# Altium PCB Board_v2.PcbDoc
Units mm, origin at the board's own origin, x right, y up, seen from the top; angles counter-clockwise.
Board outline 48 x 44 mm, 4 copper layers (Top Layer, Layer 1, Layer 2, Bottom Layer), stack 0.904 mm thick; 57 components, 41 nets, 227 pads, 53 vias.
Unrouted connection lines stored in the file: 4.
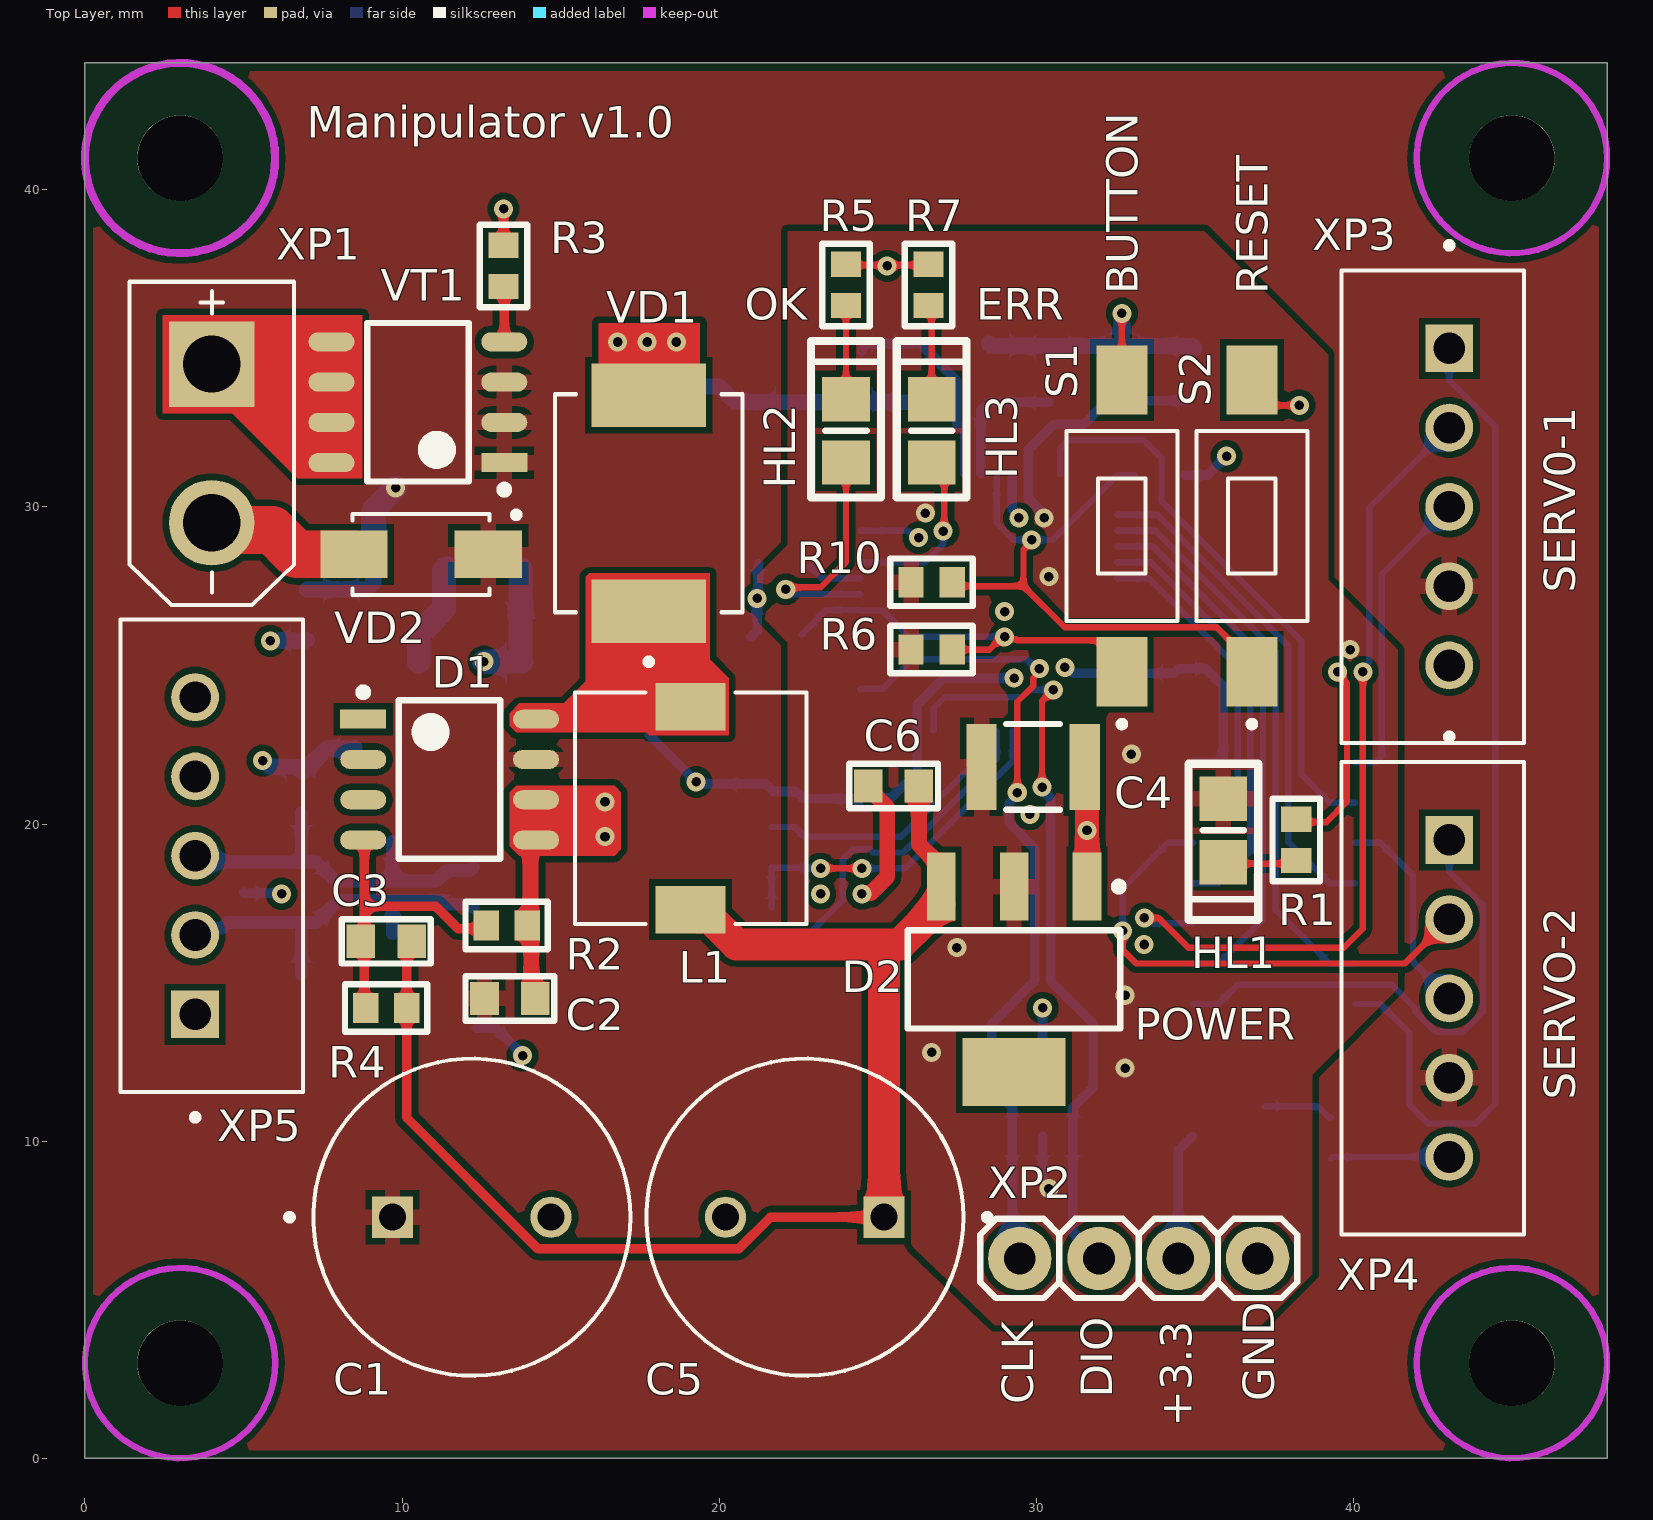
[diagram p0: Top Layer view]
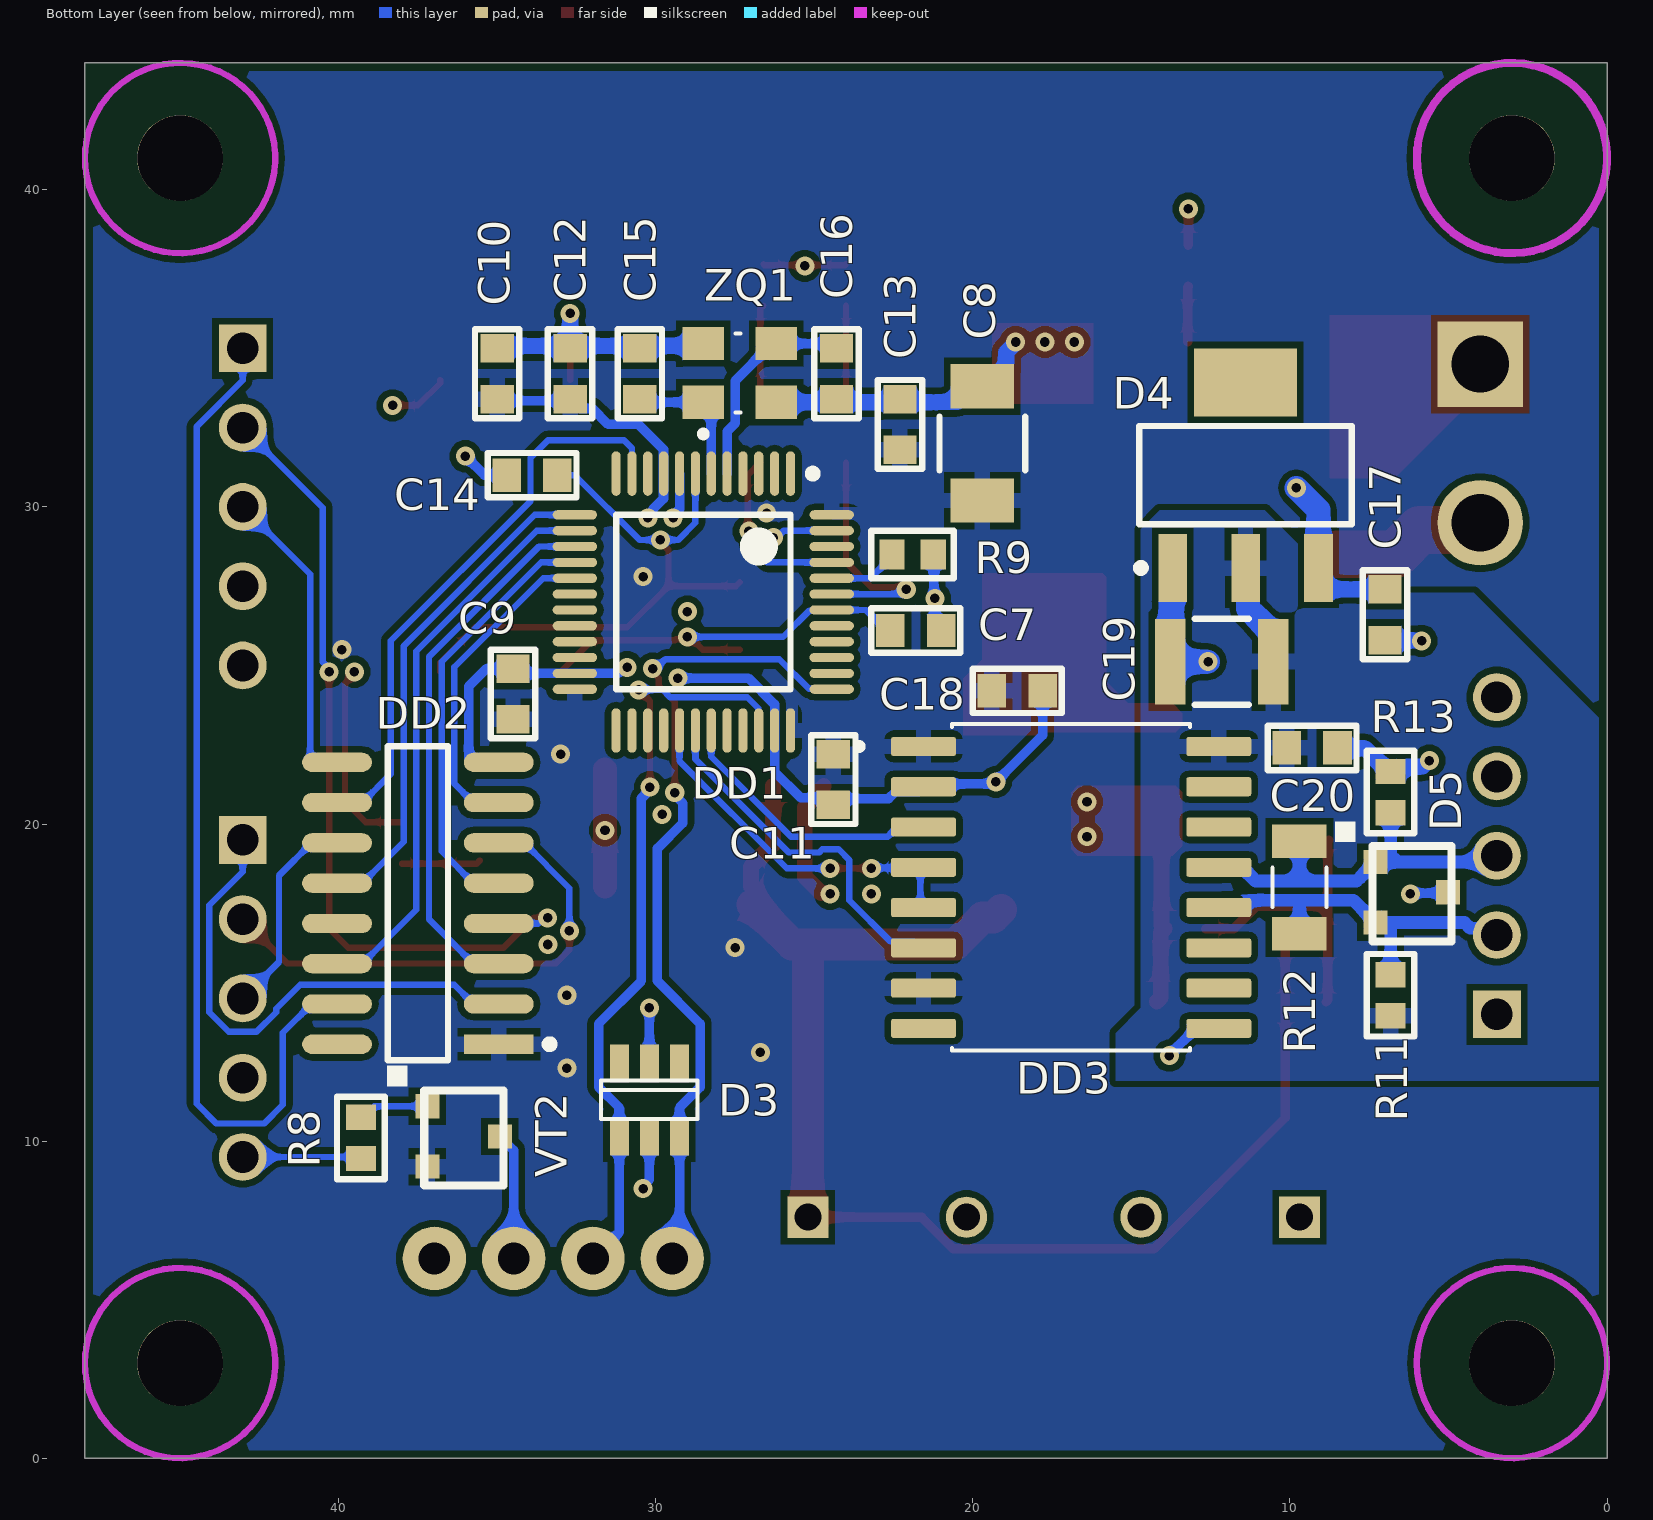
[diagram p1: Bottom Layer view, seen from below]
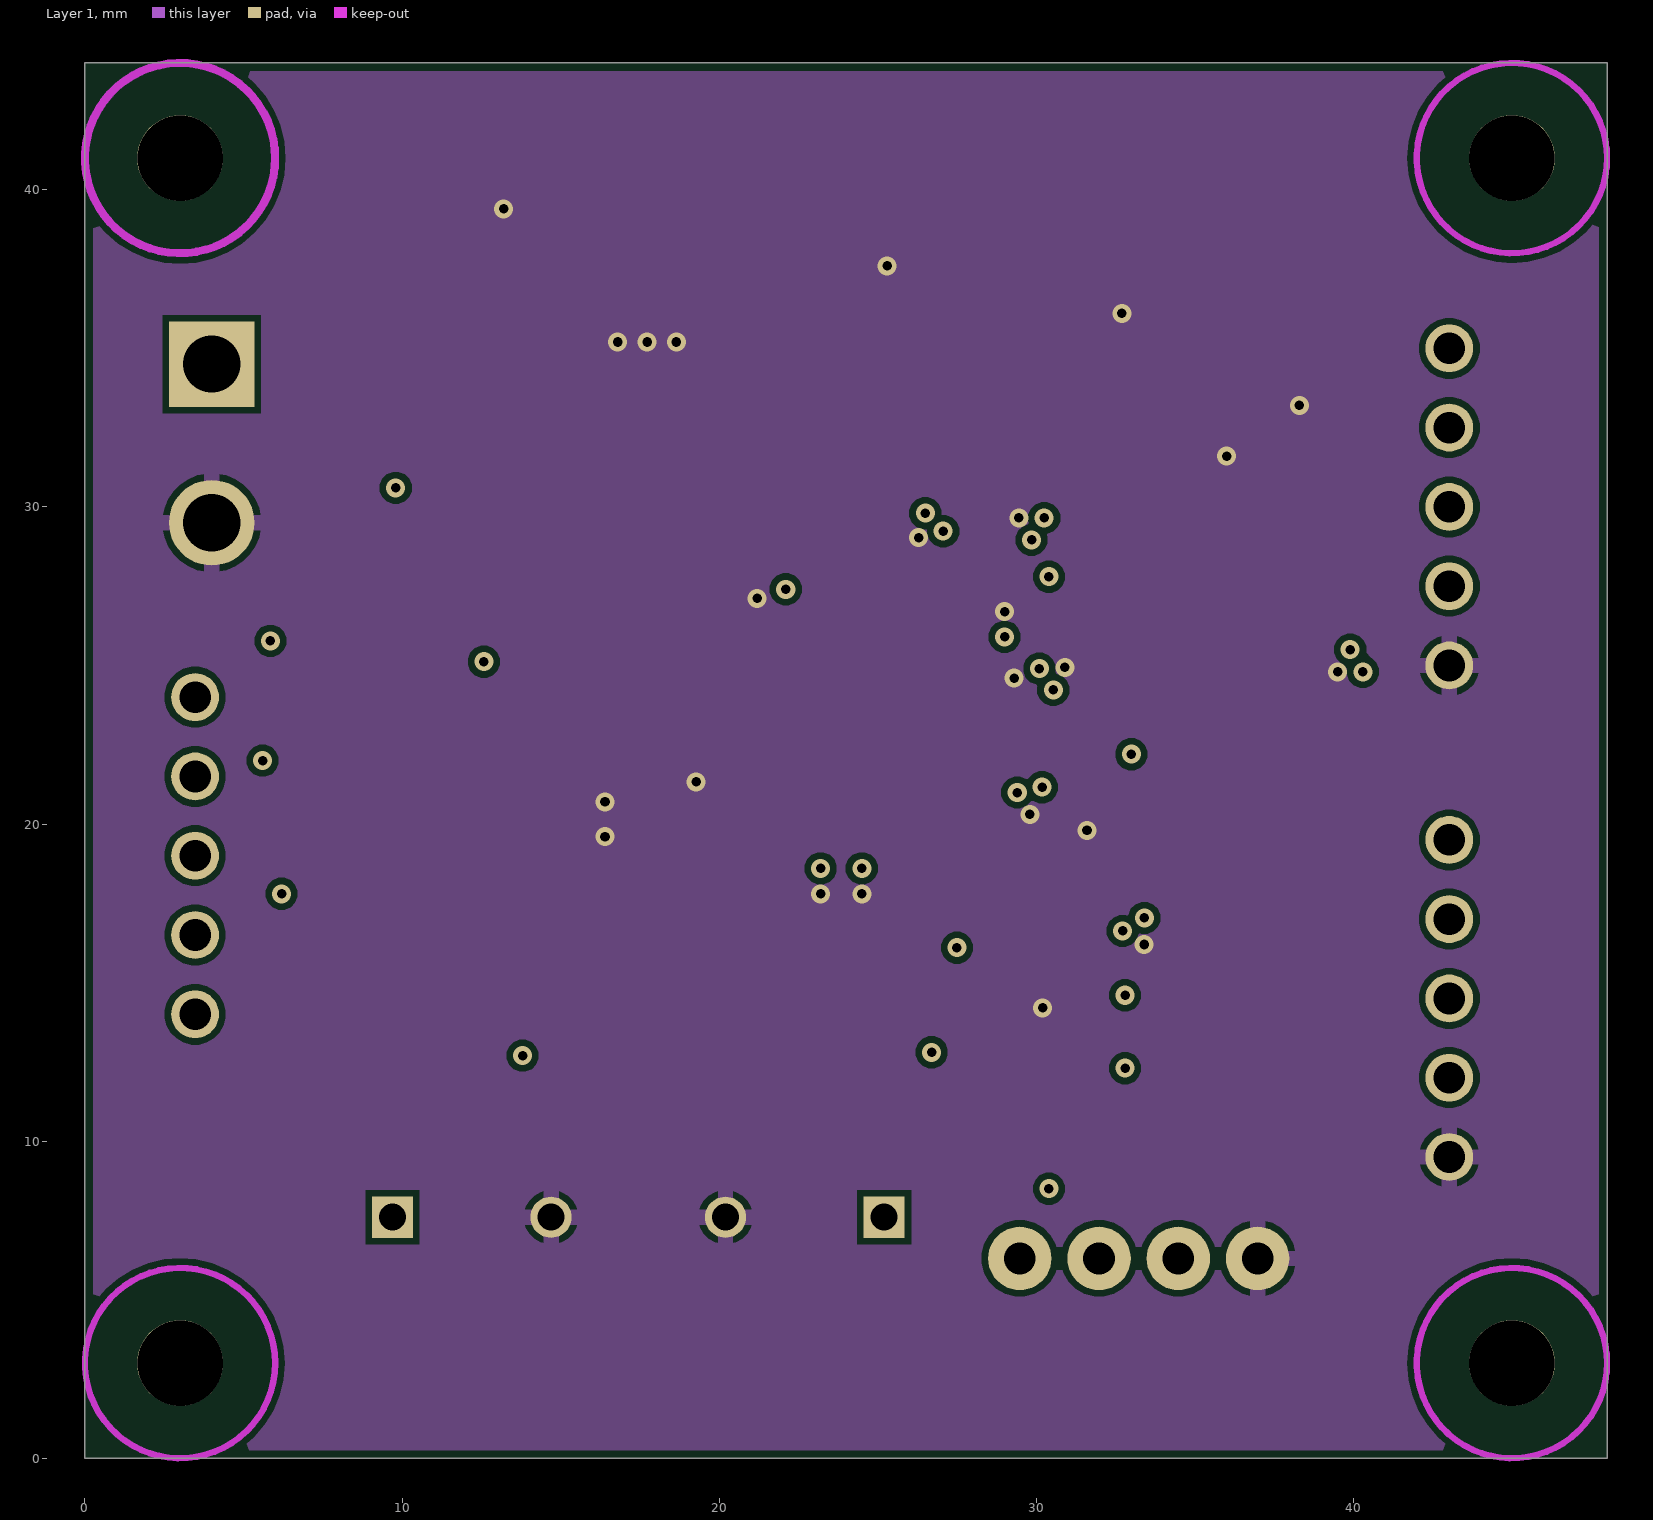
[diagram p2: Layer 1]
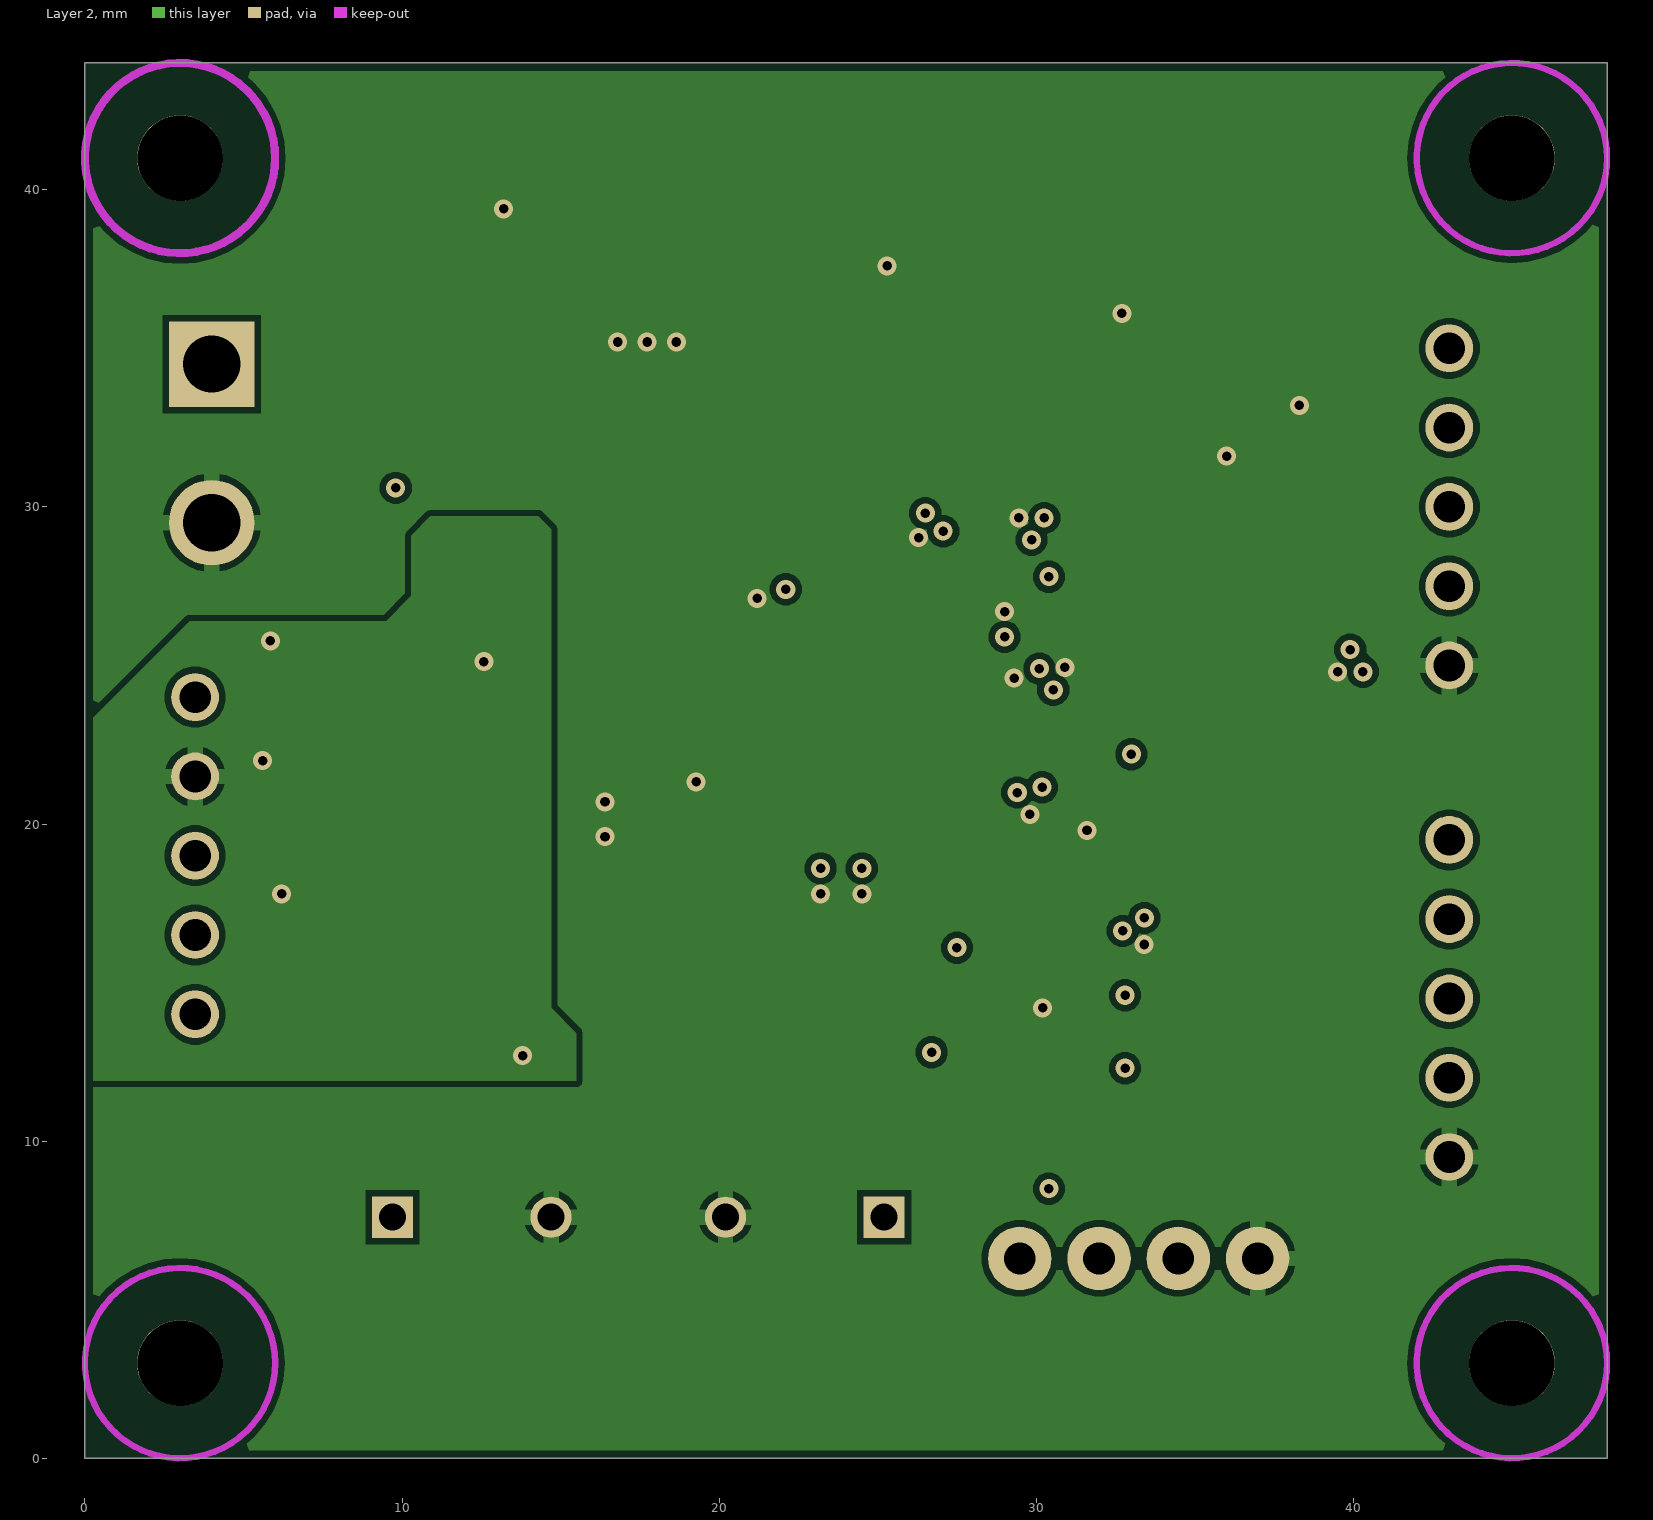
[diagram p3: Layer 2]

## Layer stack, top to bottom
Top Solder: solder mask 0.0254, SM-001, Dk 4
Top Layer: signal copper 0.035
Dielectric 2: prepreg 0.127, FR4, Dk 4.2
Layer 1: signal copper 0.035
Dielectric 1: core 0.51, FR4, Dk 4.6
Layer 2: signal copper 0.035
Dielectric 3: prepreg 0.127, FR4, Dk 4.2
Bottom Layer: signal copper 0.035
Bottom Solder: solder mask 0.0254, SM-001, Dk 4

## Board outline
0,0 48,0 48,44 0,44

## Design rules (kind name [scope] priority, off if disabled: settings)
AcuteAngle [All] p1: minimum=3.50000000000000E+0001 checktracksonly=FALSE
BoardOutlineClearance "BoardOutlineClearance 1" [All] p1: gap=0.25 ignorepadtopadclearanceinfootprint=FALSE except(0: Arc-SplitContinuation Track-SplitContinuation SMDPad-SplitContinuation THPad-SplitContinuation Via-SplitContinuation Fill-SplitContinuation Poly-SplitContinuation Region-SplitContinuation Text-SplitContinuation) // Milling
BoardOutlineClearance "BoardOutlineClearance 2" [All] p2: gap=0.4 ignorepadtopadclearanceinfootprint=FALSE except(0: Arc-SplitContinuation Track-SplitContinuation SMDPad-SplitContinuation THPad-SplitContinuation Via-SplitContinuation Fill-SplitContinuation Poly-SplitContinuation Region-SplitContinuation Text-SplitContinuation) // V-Cut
Clearance "Clearance 3 Oz" [All] p1 off: gap=0.35 ignorepadtopadclearanceinfootprint=FALSE except(0.25: Arc-Hole Track-Hole SMDPad-Hole THPad-Hole Via-Hole Fill-Hole Poly-Hole Region-Hole Text-Hole)
Clearance "Clearance 2 Oz" [All] p2 off: gap=0.3 ignorepadtopadclearanceinfootprint=FALSE except(0.25: Arc-Hole Track-Hole SMDPad-Hole THPad-Hole Via-Hole Fill-Hole Poly-Hole Region-Hole Text-Hole)
Clearance "Clearance-1 1 Oz" [All] p3: gap=0.2 ignorepadtopadclearanceinfootprint=FALSE except(0.25: Arc-Hole Track-Hole SMDPad-Hole THPad-Hole Via-Hole Fill-Hole Poly-Hole Region-Hole Text-Hole) // Standart
Clearance "Clearance-2 1 Oz" [All] p4 off: gap=0.15 ignorepadtopadclearanceinfootprint=FALSE except(0.2: Arc-Fill Arc-Poly Track-Fill Track-Poly SMDPad-Fill SMDPad-Poly THPad-Fill THPad-Poly Via-Fill Via-Poly Fill-Fill Fill-Poly Poly-Poly; 0.25: Arc-Hole Track-Hole SMDPad-Hole THPad-Hole Via-Hole Fill-Hole Poly-Hole Region-Hole Text-Hole) // Advance
Clearance "Clearance-1 1/2 Oz" [All] p5 off: gap=0.125 ignorepadtopadclearanceinfootprint=FALSE except(0.2: Arc-Fill Arc-Poly Track-Fill Track-Poly SMDPad-SMDPad SMDPad-Fill SMDPad-Poly THPad-Fill THPad-Poly Via-Fill Via-Poly Fill-Fill Fill-Poly Poly-Poly Poly-Region Poly-Text; 0.25: Arc-Hole Track-Hole SMDPad-Hole THPad-Hole Via-Hole Fill-Hole Poly-Hole Region-Hole Text-Hole) // Standart
Clearance "Clearance-2 1/2 Oz" [All] p6 off: gap=0.1 ignorepadtopadclearanceinfootprint=FALSE except(0.15: Arc-Fill Arc-Poly Track-Fill Track-Poly SMDPad-SMDPad SMDPad-Fill SMDPad-Poly THPad-Fill THPad-Poly Via-Fill Via-Poly Fill-Fill Fill-Poly Poly-Poly Poly-Region Poly-Text; 0.25: Arc-Hole Track-Hole SMDPad-Hole THPad-Hole Via-Hole Fill-Hole Poly-Hole Region-Hole Text-Hole) // Advance
DiffPairsRouting "DiffPairsRouting 1 Oz" [All] p1: maxlimit=0.25 minlimit=0.2 mostfreqgap=0.2 toplayer_minwidth=0.3 toplayer_maxwidth=0.4 toplayer_prefwidth=0.4 midlayer1_minwidth=0.3 midlayer1_maxwidth=0.4 midlayer1_prefwidth=0.4 midlayer2_minwidth=0.3 midlayer2_maxwidth=0.4 midlayer2_prefwidth=0.4 bottomlayer_minwidth=0.3 bottomlayer_maxwidth=0.4 bottomlayer_prefwidth=0.4 maxuncoupledlength=12.7
DiffPairsRouting "DiffPairsRouting 1/2 Oz" [All] p2 off: maxlimit=0.254 minlimit=0.1 mostfreqgap=0.254 toplayer_minwidth=0.1 toplayer_maxwidth=0.381 toplayer_prefwidth=0.381 midlayer1_minwidth=0.1 midlayer1_maxwidth=0.381 midlayer1_prefwidth=0.381 midlayer2_minwidth=0.1 midlayer2_maxwidth=0.381 midlayer2_prefwidth=0.381 bottomlayer_minwidth=0.1 bottomlayer_maxwidth=0.381 bottomlayer_prefwidth=0.381 maxuncoupledlength=12.7
HoleSize "Minimum HoleSize" [IsPad] p1: absolutevalues=TRUE maxlimit=5.9 minlimit=0.6 maxpercent=80.000 minpercent=20.000
HoleSize "Minimum HoleSize VIA 1" [IsVia] p2: absolutevalues=TRUE maxlimit=5.9 minlimit=0.3 maxpercent=80.000 minpercent=20.000 // Standart
HoleSize "Minimum HoleSize VIA 2" [IsVia] p3: absolutevalues=TRUE maxlimit=5.9 minlimit=0.2 maxpercent=80.000 minpercent=20.000 // Advance
HoleToHoleClearance Hole2HoleClearance [All] p1: gap=0.25 allowstackedmicrovias=FALSE
MinimumAnnularRing "Minimum AR VIA Standart" [IsVia] p1: minimumring=0.15
MinimumAnnularRing "Minimum AR PAD Standart" [IsPAD] p2: minimumring=0.2
MinimumAnnularRing "Minimum AR VIA Advance" [IsVia] p3: minimumring=0.1
MinimumAnnularRing "Minimum AR PAD Advance" [IsPAD] p4: minimumring=0.15
MinimumSolderMaskSliver "SolderMask Bridge Standart" [All] p1: minsoldermaskwidth=0.15 // All Masks
MinimumSolderMaskSliver "SolderMask Bridge Advance" [All] p2: minsoldermaskwidth=0.1 // Mask LDI
PlaneClearance "PlaneClearance 3 Oz" [All] p1 off: clearance=0.35
PlaneClearance "PlaneClearance 2 Oz" [All] p2 off: clearance=0.3
PlaneClearance "PlaneClearance 1 Oz" [All] p3: clearance=0.2
PlaneClearance "PlaneClearance-1 1/2 Oz" [All] p4 off: clearance=0.2 // Standart
PlaneClearance "PlaneClearance-2 1/2 Oz" [All] p5 off: clearance=0.15 // Advance
PlaneConnect "TermalConnect 3 Oz" [All] p1 off: planeconnectstyle=Relief reliefexpansion=0.2 reliefentries=4 reliefconductorwidth=0.35 reliefairgap=0.35 // Standart
PlaneConnect "TermalConnect 2 Oz" [All] p2 off: planeconnectstyle=Relief reliefexpansion=0.2 reliefentries=4 reliefconductorwidth=0.3 reliefairgap=0.3 // Standart
PlaneConnect "TermalConnect-1 1 Oz" [All] p3: planeconnectstyle=Relief reliefexpansion=0.2 reliefentries=4 reliefconductorwidth=0.5 reliefairgap=0.2 // Standart
PlaneConnect "TermalConnect-2 1 Oz" [All] p4 off: pad.planeconnectstyle=Relief pad.reliefexpansion=0.15 pad.reliefentries=4 pad.reliefconductorwidth=0.2 pad.reliefairgap=0.2 via.planeconnectstyle=Direct via.reliefexpansion=0.15 via.reliefentries=4 via.reliefconductorwidth=0.15 via.reliefairgap=0.15 // Advance
PlaneConnect "TermalConnect-1 1/2 Oz" [All] p5 off: planeconnectstyle=Relief reliefexpansion=0.2 reliefentries=4 reliefconductorwidth=0.2 reliefairgap=0.2 // Standart
PlaneConnect "TermalConnect-2 1/2 Oz" [All] p6 off: pad.planeconnectstyle=Relief pad.reliefexpansion=0.15 pad.reliefentries=4 pad.reliefconductorwidth=0.15 pad.reliefairgap=0.15 via.planeconnectstyle=Direct via.reliefexpansion=0.15 via.reliefentries=4 via.reliefconductorwidth=0.15 via.reliefairgap=0.15 // Advance
PolygonConnect "PolygonConnect 3 Oz" [All] p1 off: thpad.connectstyle=Relief thpad.reliefconductorwidth=0.35 thpad.reliefentries=4 thpad.polygonreliefangle="90 Angle" thpad.airgapwidth=0.35 smdpad.connectstyle=Relief smdpad.reliefconductorwidth=0.35 smdpad.reliefentries=4 smdpad.polygonreliefangle="90 Angle" smdpad.airgapwidth=0.35 via.connectstyle=Direct via.reliefconductorwidth=0.254 via.reliefentries=4 via.polygonreliefangle="90 Angle" via.airgapwidth=0.254
PolygonConnect "PolygonConnect 2 Oz" [All] p2 off: thpad.connectstyle=Relief thpad.reliefconductorwidth=0.3 thpad.reliefentries=4 thpad.polygonreliefangle="90 Angle" thpad.airgapwidth=0.3 smdpad.connectstyle=Relief smdpad.reliefconductorwidth=0.3 smdpad.reliefentries=4 smdpad.polygonreliefangle="90 Angle" smdpad.airgapwidth=0.3 via.connectstyle=Direct via.reliefconductorwidth=0.254 via.reliefentries=4 via.polygonreliefangle="90 Angle" via.airgapwidth=0.254
PolygonConnect "PolygonConnect-1 1 Oz" [All] p3: thpad.connectstyle=Relief thpad.reliefconductorwidth=0.5 thpad.reliefentries=4 thpad.polygonreliefangle="90 Angle" thpad.airgapwidth=0.2 smdpad.connectstyle=Relief smdpad.reliefconductorwidth=0.5 smdpad.reliefentries=4 smdpad.polygonreliefangle="90 Angle" smdpad.airgapwidth=0.2 via.connectstyle=Direct via.reliefconductorwidth=0.254 via.reliefentries=4 via.polygonreliefangle="90 Angle" via.airgapwidth=0.254 // Standart
PolygonConnect "PolygonConnect-2 1 Oz" [All] p4 off: thpad.connectstyle=Relief thpad.reliefconductorwidth=0.15 thpad.reliefentries=4 thpad.polygonreliefangle="90 Angle" thpad.airgapwidth=0.15 smdpad.connectstyle=Relief smdpad.reliefconductorwidth=0.15 smdpad.reliefentries=4 smdpad.polygonreliefangle="90 Angle" smdpad.airgapwidth=0.15 via.connectstyle=Direct via.reliefconductorwidth=0.254 via.reliefentries=4 via.polygonreliefangle="90 Angle" via.airgapwidth=0.254 // Advance
PolygonConnect "PolygonConnect-1 1/2 Oz" [All] p5 off: thpad.connectstyle=Relief thpad.reliefconductorwidth=0.15 thpad.reliefentries=4 thpad.polygonreliefangle="90 Angle" thpad.airgapwidth=0.2 smdpad.connectstyle=Relief smdpad.reliefconductorwidth=0.2 smdpad.reliefentries=4 smdpad.polygonreliefangle="90 Angle" smdpad.airgapwidth=0.2 via.connectstyle=Direct via.reliefconductorwidth=0.254 via.reliefentries=4 via.polygonreliefangle="90 Angle" via.airgapwidth=0.254 // Standart
PolygonConnect "PolygonConnect-2 1/2 Oz" [All] p6 off: thpad.connectstyle=Relief thpad.reliefconductorwidth=0.125 thpad.reliefentries=4 thpad.polygonreliefangle="90 Angle" thpad.airgapwidth=0.15 smdpad.connectstyle=Relief smdpad.reliefconductorwidth=0.125 smdpad.reliefentries=4 smdpad.polygonreliefangle="90 Angle" smdpad.airgapwidth=0.15 via.connectstyle=Direct via.reliefconductorwidth=0.254 via.reliefentries=4 via.polygonreliefangle="90 Angle" via.airgapwidth=0.254 // Advance
RoomDefinition MC_stm32 [InComponentClass('MC_stm32')] p1: confinementstyle=ConfineIn formatcopy=TRUE lockcomponents=FALSE outline 17.9,5.6 46,5.6 46,36.9 17.9,36.9
RoomDefinition "Power 3.3V to mc" [InComponentClass('Power 3.3V to mc')] p2: confinementstyle=ConfineIn formatcopy=TRUE lockcomponents=FALSE outline 7.625,8.8 38.4,8.8 38.4,37.5 7.625,37.5
RoomDefinition RS485 [InComponentClass('RS485')] p3: confinementstyle=ConfineIn formatcopy=TRUE lockcomponents=FALSE outline -2.75,10.75 17.025,10.75 17.025,29.7 -2.75,29.7
RoutingCorners [All] p1 off: cornerstyle=45-Degree minsetback=2.54 maxsetback=2.54
RoutingVias [All] p1: holewidth=0.3 width=0.6 viastyle="Through Hole" minholewidth=0.3 minwidth=0.6 maxholewidth=5.9 maxwidth=6.4
SilkToSilkClearance Silk2SilkClearance [All] p1 off: silktosilkclearance=0.15
SilkToSolderMaskClearance Silk2SolderMaskClearance [IsPad] p1 off: minsilkscreentomaskgap=0.15 clearancetoexposedcopper=TRUE
SolderMaskExpansion [HoleDiameter=0.3] p1: expansion=0.102 istentingtop=TRUE
SupplyNets "Schematic Supply Nets_4" [InNet('GND_SIGNAL')] p1: voltage=0.000
SupplyNets "Schematic Supply Nets_3" [InNet('GND')] p2: voltage=0.000
SupplyNets "Schematic Supply Nets_2" [InNet('+3,3 В')] p3: voltage=0.000
SupplyNets "Schematic Supply Nets_1" [InNet('+5 В')] p4: voltage=0.000
SupplyNets "Schematic Supply Nets" [InNet('+12 В')] p5: voltage=0.000
UnRoutedNet [All] p1: checkbadconnections=TRUE
Width "Width 3 Oz" [All] p1 off: maxlimit=10 minlimit=0.35 preferedwidth=0.4 checkconnectedcopper=TRUE
Width "Width 2 Oz" [All] p2 off: maxlimit=10 minlimit=0.3 preferedwidth=0.35 minimp=50.000000 maximp=50.000000 favimp=50.000000 checkconnectedcopper=TRUE
Width "Width 1 Oz" [All] p3: maxlimit=10 minlimit=0.2 preferedwidth=0.3 checkconnectedcopper=TRUE
Width "Width 1/2 Oz" [All] p4 off: maxlimit=10 minlimit=0.1 preferedwidth=0.125 checkconnectedcopper=TRUE
20 further rules are at their usual default settings.

## Classes and differential pairs
component class RS485: C17 C18 C19 C20 D4 D5 DD3 R11 R12 R13 XP5
component class "Power 3.3V to mc": C1 C2 C3 C4 C5 C6 D1 D2 HL1 L1 R1 R2 R3 R4 VD1 VD2 VT1 XP1
component class MC_stm32: C7 C8 C9 C10 C11 C12 C13 C14 C15 C16 D3 DD1 DD2 HL2 HL3 R5 R6 R7 R8 R9 R10 S1 S2 VT2 XP2 XP3 XP4 ZQ1
differential pair RS485: +RS485_P -RS485_N

## Components (designator, comment, footprint, x,y, rotation, side; value= is the part's Value field where it differs from the comment)
C1 "Capacitor_polar" RADIAL-2_10mm 12.2,7.6 r0 top value="470 мк"
C2 "Capacitor" 0603C 13.4,14.5 r0 top value="1 мк"
C3 "Capacitor" 0603C 9.5,16.3 r0 top value="3300 п"
C4 "Capacitor" 1210C 29.9,21.8 r0 top value="10 мк"
C5 "Capacitor_polar" RADIAL-2_10mm 22.7,7.6 r180 top value="470 мк"
C6 "Capacitor" 0603C 25.5,21.2 r180 top value="0,1 мк"
C7 "Capacitor" 0603C 21.8,26.1 r0 bottom value="0,1 мк"
C8 "Capacitor" 1206C 19.7,32 r90 bottom value="4,7 мк"
C9 "Capacitor" 0603C 34.5,24.1 r270 bottom value="1 мк"
C10 "Capacitor" 0603C 35,34.2 r270 bottom value="0,1 мк"
C11 "Capacitor" 0603C 24.4,21.4 r90 bottom value="0,01 мк"
C12 "Capacitor" 0603C 32.7,34.2 r270 bottom value="0,1 мк"
C13 "Capacitor" 0603C 22.3,32.6 r270 bottom value="0,1 мк"
C14 "Capacitor" 0603C 33.9,31 r180 bottom value="0,1 мк"
C15 "Capacitor" 0603C 30.5,34.2 r90 bottom value="12 п"
C16 "Capacitor" 0603C 24.3,34.2 r270 bottom value="12 п"
C17 "Capacitor" 0603C 7,26.6 r90 bottom value="0,1 мк"
C18 "Capacitor" 0603C 18.6,24.2 r0 bottom value="0,1 мк"
C19 "Capacitor" 1210C 12.15,25.118 r180 bottom value="10 мк"
C20 "Capacitor" 0603C 9.3,22.4 r0 bottom value="0,1 мк"
D1 "LM2594HVM-ADJ" SOIC-8 11.5,21.4 r0 top
D2 "LD1117S33CTR" SOT223 29.3,15.1 r270 top
D3 "USBLC6-4" SOT23-6 30.2,11.3 r0 bottom
D4 "LD1117S50CTR" SOT223 11.4,31 r90 bottom
D5 "PSM712" SOT23-3 7.3,18.8 r180 bottom
DD1 "STM32F103C8T6" LQFP48 28.5,27 r270 bottom
DD2 "CD4050B" SOIC-16 37.5,17.5 r0 bottom
DD3 "ADM2483BRWZ" SOIC-16W 16.9,18 r180 bottom
HL1 "LED" 0805D 36,19.9 r270 top
HL2 "LED" 0805D 23.9,32.3 r90 top
HL3 "LED" 0805D 26.6,32.3 r90 top
L1 "B82472G6683M" 7.3x7.3 19.1,20.5 r270 top value="68 мк"
R1 "Resistor" 0603R 38.2,19.5 r90 top value="1,0 к"
R2 "Resistor" 0603R 13.3,16.8 r180 top value="1,0 к"
R3 "Resistor" 0603R 13.2,37.6 r270 top value="10 к"
R4 "Resistor" 0603R 9.5,14.2 r0 top value="3,0 к"
R5 "Resistor" 0603R 24,37 r90 top value=200
R6 "Resistor" 0603R 26.7,25.5 r0 top value="10 к"
R7 "Resistor" 0603R 26.6,37 r90 top value="1,0 к"
R8 "Resistor" 0603R 39.3,10.1 r270 bottom value="10 к"
R9 "Resistor" 0603R 21.9,28.5 r180 bottom value="10 к"
R10 "Resistor" 0603R 26.7,27.624 r180 top value="10 к"
R11 "Resistor" 0603R 6.825,14.6 r90 bottom value=680
R12 "Resistor" 1206R 9.7,18 r90 bottom value=120
R13 "Resistor" 0603R 6.825,21.006 r90 bottom value=680
S1 "Tact_button" Button_SMD_10mm 32.7,29.4 r90 top
S2 "Tact_button" Button_SMD_10mm 36.8,29.4 r90 top
VD1 "SK32" SMC 17.8,30.1 r90 top
VD2 "SMAJ12CA" SMA 10.6,28.5 r180 top value="12 В"
VT1 "AO4411" SOIC-8 10.5,33.3 r180 top
VT2 "AO3401A" SOT23-3 37.2,11.1 r180 bottom
XP1 "XT30" XT30 4,32 r270 top
XP2 "PLS4" PLS4 29.4,6.3 r90 top
XP3 "CWF-5" CWF-5 42.5,30 r90 top
XP4 "CWF-5" CWF-5 42.5,14.5 r90 top
XP5 "CWF-5" CWF-5 4,19 r270 top
ZQ1 "XTAL_GND" QSMD3.2x2.5 28.5,33.3 r90 bottom value="8 МГц"

## Footprints (in the part's own frame and the unit in brackets; to place one, negate y for a bottom-side part, rotate by r counter-clockwise, add the part's x,y. Pads: shape width x height; smd on the part's side, far side on the other; paste and mask are expansions set on the pad)
7.3x7.3 [mm]
  rect 1.5x2.2 smd: 1(-3.2,0) 2(3.2,0)
  silkscreen extent -3.65,-3.65 3.65,3.65, body extent -3.65,-3.65 3.65,3.65, height 3.5
0603C [mm] "Chip Resistor, 2-Leads, Body 1,40x0,80mm, IPC Medium Density"
  rect 0.9x1.05 smd: 1(-0.8,0) 2(0.8,0)
  silkscreen extent -1.4,-0.7 1.4,0.7, body extent -0.85,-0.45 0.85,0.45, height 0.9
0603R [mm] "Chip Resistor, 2-Leads, Body 1.60x0.85mm, IPC Medium Density"
  rect 0.8x0.95 smd: 1(-0.65,0) 2(0.65,0)
  silkscreen extent -1.3,-0.75 1.3,0.75, body extent -0.87,-0.47 0.88,0.48, height 0.9
0805D [mm]
  rect 1.4x1.5 smd: 1(-0.9,-0.1) 2(1.1,-0.1)
  silkscreen extent -2,-1.2 2.93,1, body extent -0.97,-0.8 1.17,0.6, height 0.7
1206C [mm]
  rect 1.4x2 smd paste+0 mask+0: 1(-1.8,0) 2(1.8,0)
  silkscreen extent -0.85,-1.35 0.85,1.35, body extent -1.6,-0.74 1.6,0.86, height 1.59
1206R [mm]
  rect 1.05x1.72 smd: 1(-1.46,0) 2(1.46,0)
  silkscreen extent -0.62,-0.85 0.62,0.85, body extent -1.55,-0.77 1.55,0.78, height 0.65
1210C [mm]
  rect 0.954x2.706 smd paste+0 mask+0: 1(-1.625,0) 2(1.625,0)
  silkscreen extent -0.85,-1.35 0.85,1.35, body extent -2.35,-1.6 2.35,1.6, height 0.25
Button_SMD_10mm [mm]
  rect 2.18x1.6 smd: 1(-4.6,0) 2(4.6,0)
  silkscreen extent -6.35,-1.75 3,1.75, body extent -3.4,-1.75 3.4,1.75, height 5.2
CWF-5 [mm] "B5B-XH-A"
  rect 1.508x1.508 / inner round 1.508 / far side rect 1.508x1.508 hole 1: 1(5,-0.525)
  round 1.508 hole 1: 2(2.5,-0.525) 3(0,-0.525) 4(-2.5,-0.525) 5(-5,-0.525)
  silkscreen extent -7.45,-2.88 8.35,2.88, body extent -7.45,-2.88 7.45,2.88, height 7
LQFP48 [mm] "TSQFP, 48-Leads, Body 7,00x7,00mm, Pitch 0,50mm, IPC Medium Density"
  oval 1.4x0.29 smd: 1(-4.05,2.75) 2(-4.05,2.25) 3(-4.05,1.75) 4(-4.05,1.25) 5(-4.05,0.75) 6(-4.05,0.25) 7(-4.05,-0.25) 8(-4.05,-0.75) 9(-4.05,-1.25) 10(-4.05,-1.75) 11(-4.05,-2.25) 12(-4.05,-2.75)
  oval 0.29x1.4 smd paste+0 mask+0.09: 13(-2.75,-4.05) 14(-2.25,-4.05) 15(-1.75,-4.05) 16(-1.25,-4.05) 17(-0.75,-4.05) 18(-0.25,-4.05) 19(0.25,-4.05) 20(0.75,-4.05) 21(1.25,-4.05) 22(1.75,-4.05) 23(2.25,-4.05) 24(2.75,-4.05) 37(2.75,4.05) 38(2.25,4.05) 39(1.75,4.05) 40(1.25,4.05) 41(0.75,4.05) 42(0.25,4.05) 43(-0.25,4.05) 44(-0.75,4.05) 45(-1.25,4.05) 46(-1.75,4.05) 47(-2.25,4.05) 48(-2.75,4.05)
  oval 1.4x0.29 smd paste+0 mask+0.09: 25(4.05,-2.75) 26(4.05,-2.25) 27(4.05,-1.75) 28(4.05,-1.25) 29(4.05,-0.75) 30(4.05,-0.25) 31(4.05,0.25) 32(4.05,0.75) 33(4.05,1.25) 34(4.05,1.75) 35(4.05,2.25) 36(4.05,2.75)
  silkscreen extent -4.17,-2.75 2.75,3.57, body extent -4.5,-4.47 4.5,4.52, height 1.48
PLS4 [mm]
  round 2 hole 1: 1(0,-0.08) 2(0,-2.58) 3(0,-5.08) 4(0,-7.58)
  silkscreen extent -1.25,-8.83 1.25,1.17, body extent -1.27,-8.93 1.27,1.19, height 8.44
QSMD3.2x2.5 [mm] "Кварцевый резонатор"
  rect 1.05x1.3 smd: 1(0,0) 2(1.85,-2.3) 3(0,-2.3) 3(1.85,0)
  silkscreen extent -1.1,-1.18 2.18,0.1, body extent -0.33,-2.75 2.17,0.45, height 0.8
RADIAL-2_10mm [mm]
  rect 1.3x1.3 hole 0.85: 1(-2.5,0)
  round 1.3 hole 0.85: 2(2.5,0)
  silkscreen extent -5.85,-5 5,5, body extent -5,-5 5,5, height 12.5
SMA [mm]
  rect 2.12x1.5 smd: 1(2.115,0) 2(-2.115,0)
  silkscreen extent -3.1,-1.35 2.16,1.28, body extent -2.57,-1.28 2.57,1.28, height 2.5
SMC [mm]
  rect 2x3.6 smd: 1(3.415,0.021) 2(-3.385,0.021)
  silkscreen extent -5.08,-2.93 3.45,2.97, body extent -3.96,-2.93 3.99,2.97, height 2.65
SOIC-8 [mm] "for operational amplifier"
  rect 1.45x0.6 smd: 1(-2.725,1.905)
  oval 1.45x0.6 smd: 2(-2.725,0.635) 3(-2.725,-0.635) 4(-2.725,-1.905) 5(2.725,-1.905) 6(2.725,-0.635) 7(2.725,0.635) 8(2.725,1.905)
  silkscreen extent -2.85,-2.5 1.6,2.88, body extent -3,-2.5 3,2.5, height 1.75
SOIC-16 [mm] "SOT109-1"
  rect 2.204x0.608 smd paste+0 mask+0: 1(-2.551,4.445)
  rrect100% 2.204x0.608 smd paste+0 mask+0: 2(-2.551,3.175) 3(-2.551,1.905) 4(-2.551,0.635) 5(-2.551,-0.635) 6(-2.551,-1.905) 7(-2.551,-3.175) 8(-2.551,-4.445) 9(2.551,-4.445) 10(2.551,-3.175) 11(2.551,-1.905) 12(2.551,-0.635) 13(2.551,0.635) 14(2.551,1.905) 15(2.551,3.175) 16(2.551,4.445)
  silkscreen extent -4.28,-4.95 0.95,4.95, body extent -3.02,-4.95 3.02,4.95, height 1.75
SOIC-16W [mm]
  rrect25% 2.05x0.6 smd: 1(-4.655,4.445) 2(-4.655,3.175) 3(-4.655,1.905) 4(-4.655,0.635) 5(-4.655,-0.635) 6(-4.655,-1.905) 7(-4.655,-3.175) 8(-4.655,-4.445) 9(4.655,-4.445) 10(4.655,-3.175) 11(4.655,-1.905) 12(4.655,-0.635) 13(4.655,0.635) 14(4.655,1.905) 15(4.655,3.175) 16(4.655,4.445)
  silkscreen extent -6.78,-5.15 3.75,5.15, body extent -5.16,-5.15 5.16,5.15, height 2.65
SOT23-3 [mil]
  rect 30x30 smd: 1(0,0) 2(0,-75) 3(90,-37.5)
  silkscreen extent -50,-98 94,50, body extent -4,-97 94,21, height 41
SOT23-6 [mm]
  rect 0.6x1.2 smd: 1(-0.95,-1.15) 2(0,-1.15) 3(0.95,-1.15) 4(0.95,1.15) 5(0,1.15) 6(-0.95,1.15)
  silkscreen extent -1.52,-0.61 1.52,0.61, body extent -1.46,-1.4 1.46,1.4, height 1.4
SOT223 [mm] "SOT223, ld1117"
  rect 2.15x0.9 smd: 1(-2.925,2.3) 2(-2.925,0) 3(-2.925,-2.3)
  rect 2.15x3.25 smd: 4(2.925,0)
  silkscreen extent -3.05,-3.35 1.55,3.43, body extent -3.56,-3.3 3.51,3.2, height 1.6
XT30 [mm]
  rect 2.7x2.7 hole 1.8: 1(-2.5,0)
  round 2.7 hole 1.8: 2(2.5,0)
  silkscreen extent -5.1,-2.6 5.1,2.6, body extent -5.1,-2.6 5.1,2.6, height 10.7

## Part data
C1 C5: library part "4,7 мк", "Конденсатор электролит. 470 мкФ, 25 В, 10 мм", Part Number=Capacitor_polar
C2 C9: library part Capacitor_1u_10_50V_X7R_0603C, "Конденсатор", Capacity (nF)=1000, Dielectric=X7R, Tolerance=0,1, Voltage (V)=50, Part Number=Capacitor_1u_10_50V_X7R_0603C
C3: library part Capacitor_3,3n_10_50V_X7R_0603C, "Конденсатор", Capacity (nF)=3,3, Dielectric=X7R, Tolerance=0,1, Voltage (V)=50, Part Number=Capacitor_3,3n_10_50V_X7R_0603C
C4 C19: library part Capacitor_10u_10_35V_X7R_1210C, "Конденсатор", Capacity (nF)=10000, Dielectric=X7R, Tolerance=0,1, Voltage (V)=35, Part Number=Capacitor_10u_10_35V_X7R_1210C
C6 C7 C10 C12 C13 C14 C17 C18 C20: library part Capacitor_0,1u_10_50V_X7R_0603C, "Конденсатор", Capacity (nF)=100, Dielectric=X7R, Tolerance=0,1, Voltage (V)=50, Part Number=Capacitor_0,1u_10_50V_X7R_0603C
C8: library part Capacitor_4,7u_10_50V_X7R_1206C, "Конденсатор", Capacity (nF)=4700, Dielectric=X7R, Tolerance=0,1, Voltage (V)=50, Part Number=Capacitor_4,7u_10_50V_X7R_1206C
C11: library part Capacitor_10n_10_50V_X7R_0603C, "Конденсатор", Capacity (nF)=10, Dielectric=X7R, Tolerance=0,1, Voltage (V)=50, Part Number=Capacitor_10n_10_50V_X7R_0603C
C15 C16: library part "0,1 мк", "Конденсатор", Part Number=Capacitor
D1: "DC-DC преобразователь", Part Number=LM2594HVM-ADJ
D2 D4: "Линейный стабилизатор напряжения"
  D2: Part Number=LD1117S33CTR
  D4: Part Number=LD1117S50CTR
D3: "Сборка защитных диодов для USB", ComponentLink1Description=Shop, ComponentLink1URL=https://www.chipdip.ru/product0/8001780508, Part Number=USBLC6-4
D5: "Защитный диод для линии RS-485", Interface=RS-485, Part Number=PSM712
DD1: "Микроконтроллер", Case=корпус, Manufacturer="ST Microelectronics", Value1=MCU, Datasheet=http://www.st.com/content/ccc/resource/technical/document/datasheet/33/d4/6f/1d/df/0b/4c/6d/CD00161566.pdf/files/CD00161566.pdf/jcr:content/translations/en.CD00161566.pdf, Notice="48 пиновая версия STM32F103", Part Number=STM32F103C8T6, Rate=-0,3...4,0В, Shop="магазин с самой дешевой ценой"
DD2: "Шесть буферных элементов", Part Number=CD4050B
DD3: "Прием передатчик RS485 с гальванической развязкой", Part Number=ADM2483BRWZ
HL1 HL3: "Светодиод", Color=Красный, Part Number=LED
HL2: "Светодиод", Color=Зеленый, Part Number=LED
L1: "B82472G6683M, ЧИП-индуктивность экранированная 68мкГн ±20%, 0.82A, 26мОм", Part Number=B82472G6683M
R1 R2 R7: library part Resistor_1.0k_1_0603, "Резистор номиналом 1,0 кОм и точностью 1%", Tolerance=1%, Part Number=Resistor_1.0k_1_0603
R3 R6 R8 R9 R10: library part Resistor_10k_1_0603, "Резистор номиналом 10 кОм и точностью 1%", Tolerance=1%, Part Number=Resistor_10k_1_0603
R4: library part Resistor_3.0k_1_0603, "Резистор номиналом 3,0 кОм и точностью 1%", Tolerance=1%, Part Number=Resistor_3.0k_1_0603
R5: library part Resistor_200_1_0603, "Резистор номиналом 200 Ом и точностью 1%", Tolerance=1%, Part Number=Resistor_200_1_0603
R11 R13: library part Resistor_680_1_0603, "Резистор номиналом 680 Ом и точностью 1%", Tolerance=1%, Part Number=Resistor_680_1_0603
R12: library part Resistor_120_1_0603, "Резистор номиналом 120 Ом и точностью 1%", Tolerance=1%, Part Number=Resistor_120_1_0603
S1 S2: "Тактовая кнопка", Part Number=Tact_button
VD1: "Диод шоттки на 20 В, номинальный ток 3 А", Current (A)=3, Voltage nominal (V)=20, Part Number=SK32
VD2: "Защитный диод на 12 В, рассеиваемая мощность 400 Вт", Power (W)=400, Voltage nominal (V)=12, Part Number=SMAJ12CA
VT1 VT2: "P-канальный MOSFET"
  VT1: Part Number=AO4411
  VT2: Part Number=AO3401A
XP1: "2-пиновый разъем с ключом", Value1=+U_in, Value2=GND, Part Number=XT30
XP2: "Гребенка 4 пина", Value1=SWCLK, Value2=SWDIO, Value3="+3,3 В", Value4=GND, Part Number=PLS4
XP3: "5-пиновый разъем с ключом", Value2=SERVO1_PWM, Value3=SERVO1_FB, Value4="+12 В", Value5=GND, Part Number=CWF-5, SERVO1_DIR=SERVO1_DIR
XP4: "5-пиновый разъем с ключом", Value1=SERVO2_DIR, Value2=SERVO2_PWM, Value3=SERVO2_FB, Value4="+12 В", Value5=GND, Part Number=CWF-5
XP5: "5-пиновый разъем с ключом", Value1=NC, Value2=RS485_A, Value3=RS485_B, Value4=GND_SIGNAL, Part Number=CWF-5, Value5=NC
ZQ1: "WTL3M85421FO, Резонатор кварцевый 8МГц, 10PPM при 25°C, 20PPM при -40°С+85°C, 400Ом, 12пФ", Part Number=XTAL_GND

## Free pads (board coordinates)
  round 2.7 hole 2.7 unplated: 9(3,3) 9(3,41) 9(45,3) 9(45,41)

## Via types
v1: diameter 0.6, hole 0.3, Top Layer to Bottom Layer, tented both sides, 53 vias

## Nets (pads, with @x,y where several pads share a name; then routed paths per layer and width w, separated by ;. In a path a pad name is that pad's centre, name@x,y a point inside that pad or via, vN(x,y) a via of type N, cw(c..) or ccw(c..) an arc to the next point about the centre after c; other vN are vias at no path point)
"+3,3 В": C4.1 C8.1 C9.2 C10.2 C11.2 C12.2 C13.2 C18.2 D2.2 D3.5 DD1.9 DD1.24 DD1.36 DD1.48 DD2.1 DD3.1 DD3.7 HL1.1 R6.1 R10.2 VT2.2 | length 9.7
  Bottom Layer w0.3: D3.5 30.2,8.781 30.4,8.581 v1(30.4,8.5) ; v1(30.25,29.65) 30.25,29.731 30.1,29.881 30.1,29.919 29.755,30.264 29.755,31.045 DD1.9 29.755,31.055 29.755,31.81 30.545,32.6 31.5,32.6 32,33.1 32.4,33.1 C12.2 ; C12.2@32.7,33.35 C10.2@34.675,33.35
  other v1: 32.8,12.3 26.7,12.8 32.8,14.6 27.5,16.1 33,22.2 39.9,25.5 30.4,27.8 26.5,29.8
"+5 В": C19.2 C20.2 D4.2 DD3.16 R11.1 | length 3.3
  Bottom Layer w0.75: C19.2 10.525,25.994 11.325,26.794 11.325,28 D4.2
"+12 В": C1.1 C2.1 C17.2 D1.7 D4.3 VD2.2 VT1.1 VT1.2 VT1.3 XP3.4 XP4.4 | length 5.5
  Bottom Layer w0.5: C17.2 8.9,27.4 9.1,27.6 D4.3
  Bottom Layer w0.75: D4.3 9.1,29.9 v1(9.8,30.6)
BUTTON: C7.2 DD1.42 R6.2 S1.1 | length 13.3
  Top Layer w0.2: R6.2 28.513,25.5 v1@28.913,25.9 ; v1(29,25.9) 29.077,25.823 29.359,25.823 29.393,25.79 32.01,25.79 S1.1@33,24.8
  Bottom Layer w0.2: C7.2@22.6,25.975 23.375,26.75 DD1.42 24.467,26.733 25.152,26.733 25.984,25.9 v1(29,25.9)
GND: C1.2 C2.2 C4.2 C5.2 C6.2 C7.1 C8.2 C9.1 C10.1 C11.1 C12.1 C13.1 C14.1 C15.2 C16.2 C18.1 D1.5 D1.6 D2.1 D3.2 DD1.8 DD1.23 DD1.35 DD1.47 DD2.8 DD3.2 R1.2 R2.1 R3.1 R5.2 R7.2 R8.2 R9.2 S1.2 S2.2 VD1.1 VD2.1 XP1.2 XP2.4 XP3.5 XP4.5 ZQ1.3 | length 88.2
  Top Layer w0.2: R5.2 24.025,37.625 25.275,37.625 v1(25.3,37.6) 25.325,37.625 26.575,37.625 R7.2 ; S1.2 v1(32.7,36.1) ; S2.2 36.8,33.9 37.5,33.2 v1(38.3,33.2) ; R1.2@38,20.05 38.008,20.058 39.141,20.058 39.8,20.717 39.8,24.426 39.5,24.726 v1(39.5,24.8)
  Top Layer w0.3: R3.1 v1(13.2,39.4)
  Top Layer w0.5: D1.5@13.95,19.495 14.179,19.495 D1.5@14.225,19.541 ; C2.2@14.2,14.4 14.075,14.525 14.075,16.575 13.95,16.7 14.05,16.8 14.05,19.283 14.225,19.458 D1.5 ; v1@24.519,17.819 24.78,17.819 25.3,18.339 25.3,20.525 24.9,20.925 24.9,21 C6.2 ; 31.525,20.446 C4.2
  Top Layer w0.75: D2.1 v1(31.6,19.8) 31.6,20.3 31.6,20.75 C4.2@31.6,21.725
  Top Layer w1.5: XP1.2 4.23,29.27 5.905,29.27 6.675,28.5 VD2.1
  Bottom Layer w0.2: DD1.47 25.96,29.25 26.182,29.028 v1(26.29,29.028) ; R8.2 39.35,9.5 XP4.5
  Bottom Layer w0.3: C18.1 17.8,22.8 19.332,21.268 21.462,21.268 21.705,21.025 22.43,21.025 22.655,20.8 24.4,20.8 C11.1 ; C7.1@21,25.9 21.2,26.1 v1(21.2,27.113) 21.225,27.137 21.225,28.175 R9.2@21.25,28.2 ; C11.1@24.505,20.83 25.43,20.83 26.245,21.645 26.245,22.945 DD1.35 26.25,23.771 27.079,24.6 v1(29.3,24.6) ; DD1.8 29.25,29.931 29.45,29.731 v1(29.45,29.65) ; D3.2 v1(30.2,14.2) ; v1(30.904,24.942) 30.985,24.942 31.177,24.75 DD1.23 34.35,24.75 C9.1 35.34,24.9 35.901,24.338 35.901,22.182 35.664,21.945 DD2.8 ; C14.1 35.4,31 v1(36,31.6)
  Bottom Layer w0.5: v1(18.65,35.2) 18.65,35.173 18.95,34.873 18.95,34.25 19.4,33.8 C8.2 20,33.8 20.5,33.3 22.4,33.3 24.3,33.3 ZQ1.3@26.2,33.3 ; ZQ1.3@28.5,35.15 28.575,35.075 C12.1@32.7,35.075 ; C12.1 C12.1@32.7,35.075 ; v1(32.7,36.1) C12.1@32.7,35.075 ; C10.1 34.925,35.075 C12.1@32.7,35.075
  other v1: 33.4,16.2 23.2,17.8 24.5,17.8 16.4,19.6 29.8,20.3 16.4,20.7 19.275,21.325 29,26.7 16.8,35.2 17.725,35.2
GND_SIGNAL: C17.1 C19.1 C20.1 D4.1 D5.3 DD3.9 R13.2 XP5.4 | length 11.8
  Bottom Layer w0.3: XP5.4 XP5.4@3.525,21.45 ; D5.3 5.038,17.824 6.176,17.824 v1(6.2,17.8) ; DD3.9@12.345,13.555 12.97,13.555 13.799,12.726 v1(13.799,12.695)
  Bottom Layer w0.5: v1(5.6,22) 5.627,22 5.821,21.806 6.675,21.806 R13.2 6.9,21.656 7.627,22.384 8.484,22.384 C20.1 ; v1(5.85,25.775) 5.863,25.787 6.988,25.787 C17.1 ; D4.1 D4.1@13.738,28.037 ; C19.1@13.738,25.155 C19.1
  Bottom Layer w0.75: v1(12.582,25.118) C19.1 ; C19.1@13.738,25.155 D4.1@13.738,28.037
LED_ERROR: DD1.45 HL3.1 | length 5.6
  Top Layer w0.2: HL3.1 27.1,31 27.1,29.269 v1(27.064,29.232)
  Bottom Layer w0.2: DD1.45 26.491,28.25 27.064,28.823 v1(27.064,29.232)
LED_OK: DD1.43 HL2.1 | length 7.8
  Top Layer w0.2: v1(22.1,27.4) 22.161,27.461 23.2,27.461 24,28.261 HL2.1
  Bottom Layer w0.2: v1(22.1,27.4) 22.208,27.4 22.358,27.25 DD1.43
NetC3_1: C3.1 D1.4 R2.2 R4.1 | length 9.3
  Top Layer w0.3: D1.4 8.812,19.457 8.812,17.4 ; R4.1@8.85,14.4 8.812,14.437 8.812,16.7 8.812,17.4 ; R2.2@12.65,16.7 11.77,16.7 11.07,17.4 8.812,17.4
NetC3_2: C3.2 C5.1 C6.1 D2.3 L1.2 R4.2 | length 43.9
  Top Layer w0.3: C3.2@10.15,16.55 10.15,10.736 14.286,6.6 20.614,6.6 21.614,7.6 C5.1
  Top Layer w0.5: C6.1 26.3,19.35 27,18.65 D2.3
  Top Layer w1: L1.2 19.35,17.05 19.7,17.05 20.55,16.2 25.2,16.2 ; C5.1 25.2,16.2 ; D2.3@26.95,17.45 25.7,16.2 25.2,16.2
NetC14_2: C14.2 DD1.7 R10.1 S2.1 | length 19.3
  Top Layer w0.2: R10.1 27.471,27.503 29.597,27.503 ; v1(29.85,28.957) 29.85,28.897 29.597,28.644 29.597,27.503 ; S2.1 36.8,25.09 35.69,26.2 30.9,26.2 29.597,27.503
  Bottom Layer w0.2: DD1.7 28.75,29.501 29.294,28.957 v1(29.85,28.957) 30.507,28.957 32.55,31 C14.2
NetC15_1: C15.1 DD1.6 ZQ1.1 | length 4.3
  Bottom Layer w0.3: DD1.6 28.25,33.05 ZQ1.1 C15.1@30.4,33.3
NetC16_1: C16.1 DD1.5 ZQ1.2 | length 6.7
  Bottom Layer w0.3: C16.1@24.5,34.9 24.5,34.975 24.675,35.15 26.325,35.15 27.5,33.975 27.5,32.63 27.75,32.38 DD1.5
NetD1_8: D1.8 L1.1 VD1.2
NetDD1_29: DD1.29 DD3.4 DD3.5 | length 11.2
  Top Layer w0.2: v1(23.2,18.6) v1(24.5,18.6)
  Bottom Layer w0.2: DD3.5@21.655,17.365 21.655,18.635 21.672,18.618 23.182,18.618 v1(23.2,18.6) ; v1(24.5,18.6) 25.866,18.6 29.25,21.984 DD1.29
NetDD1_30: DD1.30 DD3.6 | length 11.3
  Bottom Layer w0.2: DD3.6@21.655,16.095 21.855,16.295 22.595,16.295 23.9,17.6 23.9,18.866 24.234,19.2 24.749,19.2 24.849,19.1 25.8,19.1 28.75,22.05 DD1.30
NetDD1_31: DD1.31 DD3.3 | length 8.6
  Bottom Layer w0.2: DD3.3@21.655,19.905 22.38,19.905 22.685,19.6 25.734,19.6 28.25,22.116 DD1.31
NetDD1_44: DD1.44 R9.1 | length 1.8
  Bottom Layer w0.2: R9.1@22.85,28.125 23.225,27.75 DD1.44
NetHL1_2: HL1.2 R1.1 | length 2.5
  Top Layer w0.2: HL1.2@35.55,18.85 35.65,18.75 R1.1@38,18.75
NetHL2_2: HL2.2 R5.1 | length 2.9
  Top Layer w0.2: HL2.2 R5.1
NetHL3_2: HL3.2 R7.1 | length 3
  Top Layer w0.2: R7.1 26.7,36.25 HL3.2
NetR3_2: R3.2 VT1.4 | length 1.8
  Top Layer w0.3: R3.2 13.225,36.925 VT1.4
NetR8_1: R8.1 VT2.1 | length 2.2
  Bottom Layer w0.2: VT2.1 38.875,11.1 39.225,10.75 R8.1
NetVT1_5: VT1.5 VT1.6 VT1.7 VT1.8 XP1.1
NetVT2_3: VT2.3 XP2.3 | length 4
  Bottom Layer w0.3: XP2.3 34.48,9.714 VT2.3
RS485_N: D5.1 DD3.13 R12.2 R13.1 XP5.3 | length 12
  Bottom Layer w0.4: XP5.3 3.675,18.8 D5.1 7.9,18.2 9.7,18.2 ; 6.7,18.9 6.825,19.025 R13.1 ; R12.2 9.7,18.2 ; DD3.13 12.145,18.535 11.42,18.535 11.085,18.2 9.7,18.2
RS485_P: D5.2 DD3.12 R11.2 R12.1 XP5.2 | length 12.1
  Bottom Layer w0.4: XP5.2 3.687,16.712 4.315,16.712 4.498,16.895 6.8,16.895 ; R11.2 6.825,16.87 6.8,16.895 ; R12.1 9.7,17.545 9.645,17.6 ; DD3.12 12.145,17.465 11.42,17.465 11.285,17.6 9.645,17.6 ; 6.8,16.895 D5.2 8.005,17.6 9.645,17.6
SERVO1_DIR: DD1.14 DD2.14 | length 17.9
  Bottom Layer w0.2: DD1.14 33.747,29.25 37.551,25.446 37.551,17.296 39.253,15.595 DD2.14
SERVO1_DIR_OUT: DD2.15 XP3.1 | length 32
  Bottom Layer w0.2: DD2.15 40.849,14.325 41.758,13.416 41.758,11.142 42.346,10.554 43.854,10.554 44.479,11.179 44.479,32.537 43.025,33.991 XP3.1
SERVO1_FB: DD1.11 DD2.10 | length 18.2
  Bottom Layer w0.2: DD1.11 30.75,31.85 31,32.1 33.399,32.1 33.95,31.549 33.95,30.178 38.351,25.777 38.351,21.576 39.253,20.675 DD2.10
SERVO1_FB_IN: DD2.9 XP3.3 | length 9.7
  Bottom Layer w0.2: DD2.9 40.712,21.945 40.9,22.133 40.9,27.875 XP3.3
SERVO1_PWM: DD1.16 DD2.5 | length 13.7
  Bottom Layer w0.2: DD1.16 33.616,28.25 36.751,25.114 36.751,19.139 35.747,18.135 DD2.5
SERVO1_PWM_OUT: DD2.4 XP3.2 | length 26.1
  Top Layer w0.2: v1(33.411,17.037) 33.863,17.037 34.799,16.101 39.701,16.101 40.3,16.7 v1(40.3,24.8)
  Bottom Layer w0.2: v1(33.411,17.037) 33.519,17.037 33.691,16.865 DD2.4 ; v1(40.3,24.8) 40.3,24.908 40.5,25.108 40.5,29.975 XP3.2
SERVO2_DIR: DD1.15 DD2.3 | length 17.1
  Bottom Layer w0.2: DD1.15 33.681,28.75 37.151,25.28 37.151,16.999 35.747,15.595 DD2.3
SERVO2_DIR_OUT: DD2.2 XP4.1 | length 16.2
  Bottom Layer w0.2: DD2.2 35.747,14.325 36.351,14.929 41.215,14.929 41.971,14.173 41.971,14.063 42.588,13.446 43.462,13.446 44.079,14.063 44.079,17.437 43.025,18.491 XP4.1
SERVO2_FB: DD1.13 DD2.12 | length 15.9
  Bottom Layer w0.2: DD1.13 33.813,29.75 37.951,25.611 37.951,19.436 39.253,18.135 DD2.12
SERVO2_FB_IN: DD2.11 XP4.3 | length 6.6
  Bottom Layer w0.2: DD2.11 40.849,19.405 41.879,18.376 41.879,15.646 XP4.3
SERVO2_PWM: DD1.17 DD2.7 | length 9.9
  Bottom Layer w0.2: DD1.17 33.55,27.75 36.351,24.949 36.351,21.279 35.747,20.675 DD2.7@35.348,20.675
SERVO2_PWM_OUT: DD2.6 XP4.2 | length 15.8
  Top Layer w0.2: v1(32.724,16.627) 32.724,16.027 33.151,15.6 41.625,15.6 XP4.2
  Bottom Layer w0.2: v1(32.724,16.627) 32.724,17.978 34.151,19.405 DD2.6
SWCLOCK: D3.6 DD1.37 XP2.1 | length 26.4
  Top Layer w0.2: v1(29.4,20.993) 29.4,23.851 29.9,24.351 29.9,24.592 30.1,24.792 v1(30.1,24.9)
  Bottom Layer w0.2: DD1.37 24.467,24.267 25.167,24.267 26.1,25.2 29.692,25.2 29.992,24.9 v1(30.1,24.9)
  Bottom Layer w0.3: v1(29.4,20.993) 29.4,20.912 29.15,20.662 29.15,20.031 29.95,19.231 29.95,15.05 28.6,13.7 28.6,11.705 29.25,11.055 29.25,6.53 XP2.1
SWDIO: D3.4 DD1.34 XP2.2 | length 24.1
  Top Layer w0.2: v1(30.182,21.161) 30.182,23.875 v1(30.538,24.23)
  Bottom Layer w0.2: DD1.34 26.767,22.967 26.767,23.652 27.116,24 29.549,24 29.779,24.23 v1(30.538,24.23)
  Bottom Layer w0.3: v1(30.182,21.161) 30.182,21.08 30.45,20.812 30.45,20.031 30.45,15.05 31.8,13.7 31.8,11.705 31.15,11.055 31.15,7.13 XP2.2
pads on no net: D1.1 D1.2 D1.3 D2.4 D3.1 D3.3 D4.4 DD1.1 DD1.2 DD1.3 DD1.4 DD1.10 DD1.12 DD1.18 DD1.19 DD1.20 DD1.21 DD1.22 DD1.25 DD1.26 DD1.27 DD1.28 DD1.32 DD1.33 DD1.38 DD1.39 DD1.40 DD1.41 DD1.46 DD2.13 DD2.16 DD3.8 DD3.10 DD3.11 DD3.14 DD3.15 XP5.1 XP5.5

## Polygon pours and split planes (outlines as drawn)
"+3,3 В" on Bottom Layer "+3,3_В_L04_P011" (solid, remove dead copper, pour order 11): 0,0 48,0 48,44 0,44
"+5 В" on Bottom Layer "+5_В_L04_P002" (solid, remove dead copper, pour order 2): 9.4,27.3 9.4,28.489 10.789,29.9 14.1,29.9 14.7,29.3 14.7,14.2 15.5,13.4 15.5,11.9 0,11.9 0,23.1 4.2,27.3
GND_SIGNAL on Layer 2 "GND_SIGNAL_L03_P013" (solid, remove dead copper, pour order 13): 10.295,29.09 10.295,27.195 9.5,26.4 3.3,26.4 0,23.1 0,11.9 15.5,11.9 15.5,13.4 14.7,14.2 14.7,29.3 14.3,29.7 10.895,29.7
GND on Layer 2 "GND_L03_P014" (solid, remove dead copper, pour order 14): 0,0 48,0 48,44 0,44
"+12 В" on Top Layer "+12_В_L01_P010" (solid, remove dead copper, pour order 10): 0,0 48,0 48,44 0,44
"+3,3 В" on Top Layer "+3,3_В_L01_P007" (solid, remove dead copper, pour order 7): 21.2,26.684 22.161,25.722 22.161,16.5 25.2,16.5 25.2,7.519 28.685,4.2 37.1,4.2 38.7,5.8 38.7,12.1 41.4,14.8 41.4,25.5 39.2,27.7 39.2,34.8 35.3,38.7 22.161,38.7 22.161,28.8 21.2,27.839 21.2,27.613
GND on Layer 1 "GND_L02_P012" (solid, remove dead copper, pour order 12): 0,0 48,0 48,44 0,44

## Keep-outs
Keep-Out Layer:
  circle w0.2: c45,41 r3
  circle w0.254: c3,41 r3
  circle w0.2: c3,3 r3
  circle w0.2: c45,3 r3

## Other copper
Top Layer:
  rectangle net GND: 16.2,33.25 19.4,35.8
  region net NetD1_8: 13.7,23.8 13.4,23.5 13.4,23.1 13.6,22.9 17.7,22.9 17.8,22.8 20.3,22.8 20.3,24.6 19.7,25.2 19.7,27.9 15.9,27.9 15.8,27.8 15.8,24.5 15.1,23.8
  region net GND: 13.4,21 13.6,21.2 16.7,21.2 16.9,21 16.9,19.2 16.7,19 13.7,19 13.4,19.3
  region net NetVT1_5: 2.45,36.05 8.75,36.05 8.75,30.9 6.7,30.9 4.65,32.95 2.45,32.95

## Silkscreen, mask and mechanical layers (free items; w line width, h text height)
Top Overlay:
  text "Manipulator v1.0" at 7,41.633 h1
  text "BUTTON" at 33.2,36.7 h1 r90
  text "RESET" at 37.3,36.7 h1 r90
  text "OK" at 20.8,35.9 h1
  text "ERR" at 28.1,35.9 h1
  text "SERV0-1" at 47,27.3 h1 r90
  text "POWER" at 33.1,13.2 h1
  text "SERVO-2" at 47,11.3 h1 r90
  text "DIO" at 32.4,1.9 h1 r90
  text "GND" at 37.5,1.8 h1 r90
  text "CLK" at 29.9,1.7 h1 r90
  text "+3.3" at 34.9,1 h1 r90